# EAGLE board Motorsteuerung_op (EAGLE 9.5.1)
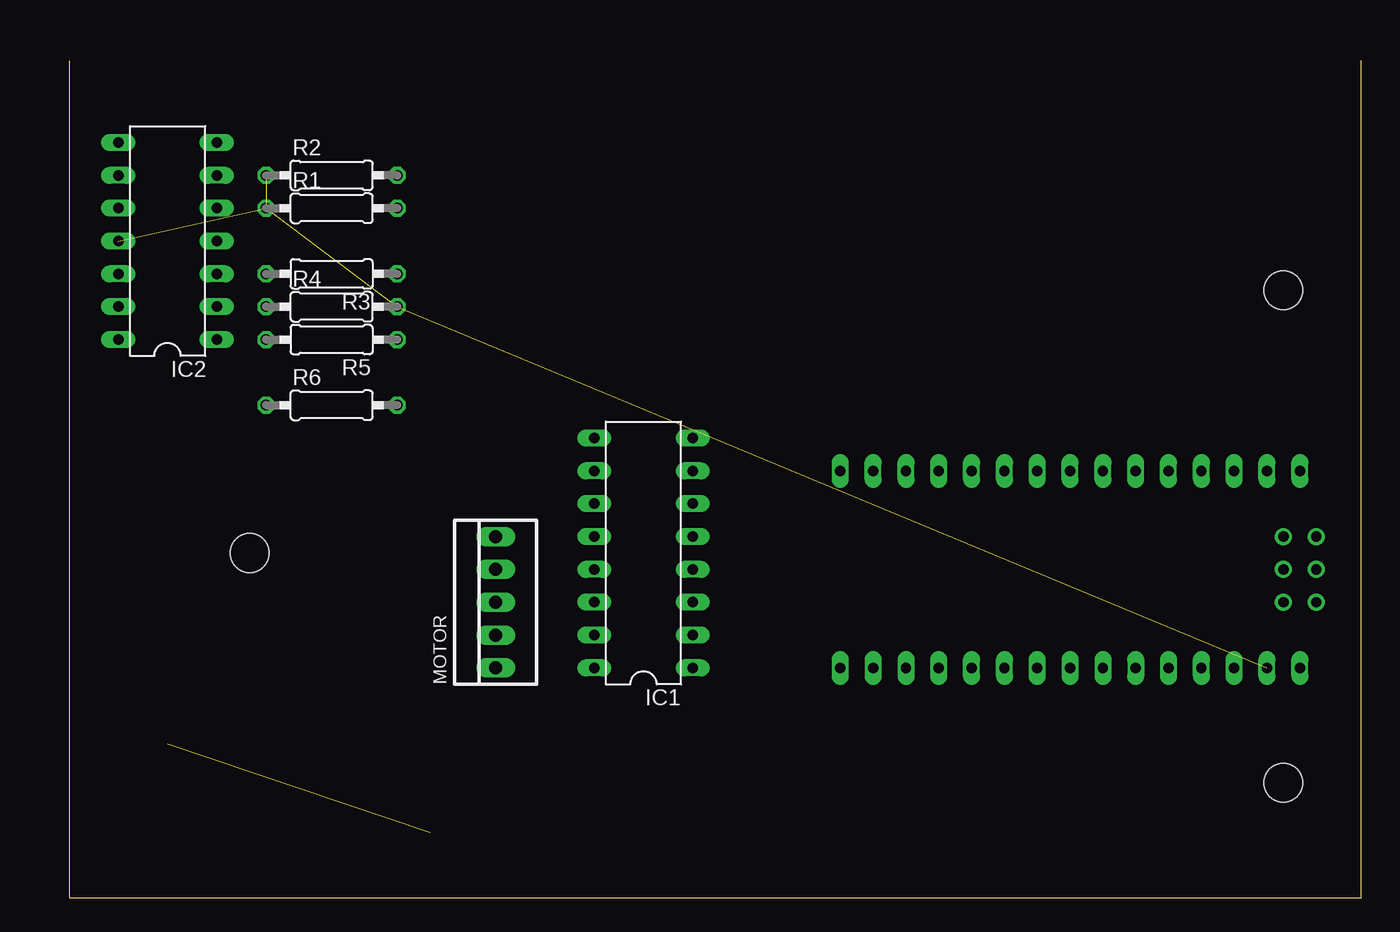
[diagram p0: board, top side]
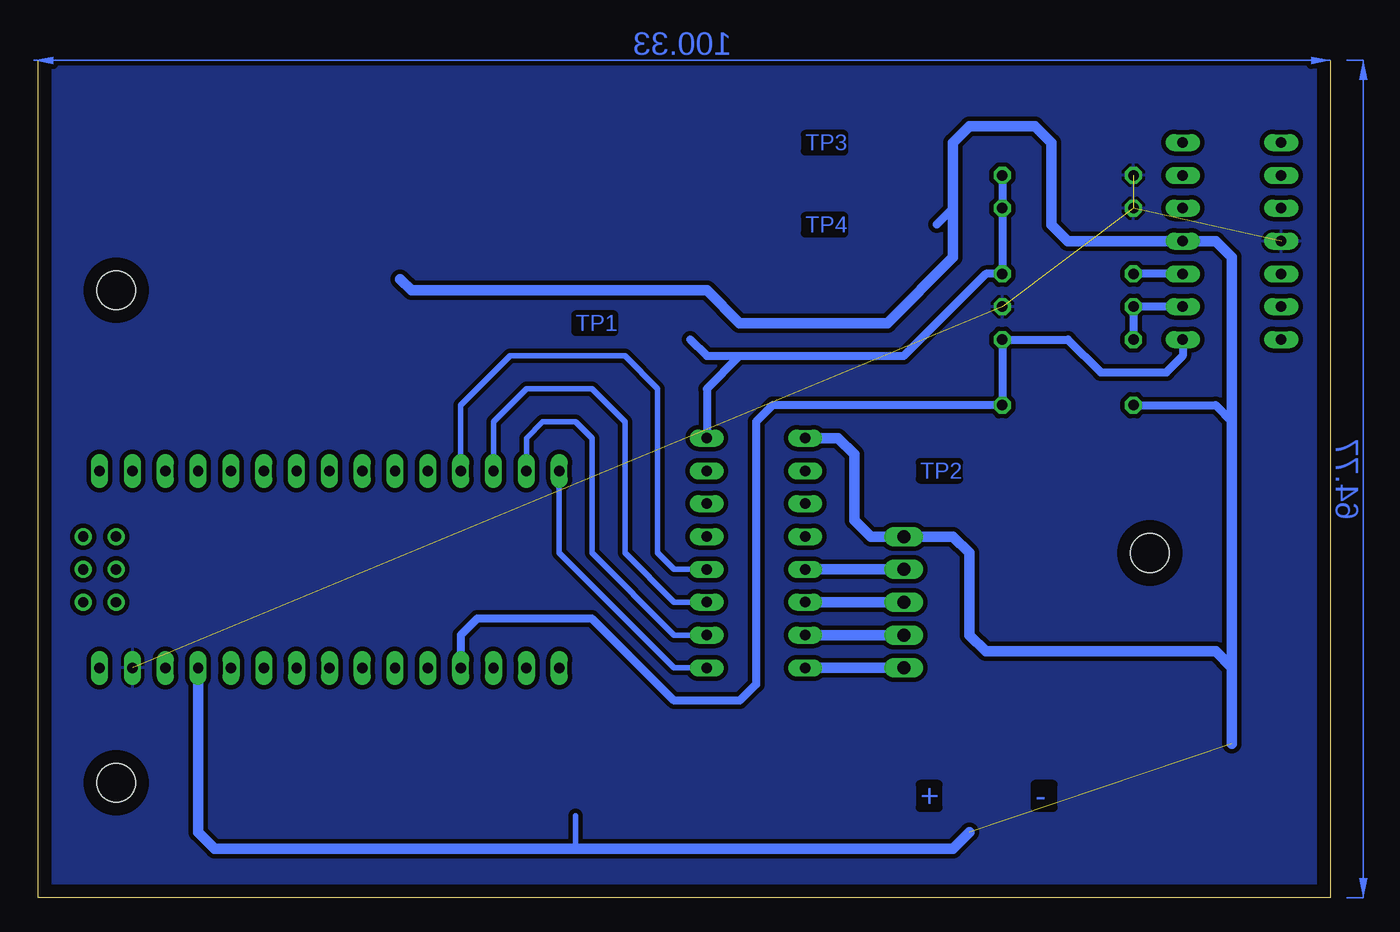
[diagram p1: board, bottom side, seen from below]

Size 100 x 64.76 mm. Coordinates in mm from the lower left corner, seen from the top.
Outline: 100,64.76 100,0 0,0 0,64.76
Copper layers (1*16): Top 0.035mm / dielectric 1.5mm / Bottom 0.035mm
Design rules "default *": minimum track width 6mil, minimum drill 0.35mm, track to track 6mil, track to pad 6mil, pad to pad 6mil, via to via 6mil, smd to smd 6mil, copper to edge 40mil, drill to drill 6mil, minimum pad ring 10mil, minimum via ring 8mil, stop-mask expansion 4mil, vias tented up to drill 0mil, thermal gap 10mil
Holes 3 mm at 13.97,26.67 93.98,8.89 93.98,46.99

## Footprints (pad centres in the part's own frame; a part is rotated, then mirrored left to right if it is on the bottom)
DIL16 = drill 0.813 long: 1 -8.89,-3.81; 2 -6.35,-3.81; 3 -3.81,-3.81; 4 -1.27,-3.81; 5 1.27,-3.81; 6 3.81,-3.81; 7 6.35,-3.81; 8 8.89,-3.81; 9 8.89,3.81; 10 6.35,3.81; 11 3.81,3.81; 12 1.27,3.81; 13 -1.27,3.81; 14 -3.81,3.81; 15 -6.35,3.81; 16 -8.89,3.81
DIL14 = drill 0.813 long: 1 -7.62,-3.81; 2 -5.08,-3.81; 3 -2.54,-3.81; 4 0,-3.81; 5 2.54,-3.81; 6 5.08,-3.81; 7 7.62,-3.81; 8 7.62,3.81; 9 5.08,3.81; 10 2.54,3.81; 11 0,3.81; 12 -2.54,3.81; 13 -5.08,3.81; 14 -7.62,3.81
22-23-2051 = drill 1 long: 1 -5.08,0; 2 -2.54,0; 3 0,0; 4 2.54,0; 5 5.08,0
0207/10 = drill 0.813 octagon: 1 -5.08,0; 2 5.08,0
NANO = drill 0.8 long: 3.3V -10.16,24.13; 5V -10.16,-1.27; A0 -10.16,19.05; A1 -10.16,16.51; A2 -10.16,13.97; A3 -10.16,11.43; A4 -10.16,8.89; A5 -10.16,6.35; A6 -10.16,3.81; A7 -10.16,1.27; AREF -10.16,21.59; D2 5.08,1.27; D3 5.08,3.81; D4 5.08,6.35; D5 5.08,8.89; D6 5.08,11.43; D7 5.08,13.97; D8 5.08,16.51; D9 5.08,19.05; D10 5.08,21.59; D11 5.08,24.13; D12 5.08,26.67; D13 -10.16,26.67; GND -10.16,-6.35; GND1 5.08,-1.27; RAW -10.16,-8.89; RST -10.16,-3.81; RST1 5.08,-3.81; RX1 5.08,-6.35; TX0 5.08,-8.89 | drill 0.8: ICSP1 -5.08,-10.16; ICSP2 -5.08,-7.62; ICSP3 -2.54,-10.16; ICSP4 -2.54,-7.62; ICSP5 0,-10.16; ICSP6 0,-7.62

## Placement (x,y rotation side)
IC1  ULN2003AN  [DIL16]  44.45,26.67 90 top
IC2  LM324P  [DIL14]  7.62,50.8 90 top
MOTOR  22-23-2051  [22-23-2051]  33.02,22.86 90 top
R1  6R2  [0207/10]  20.32,53.34 0 top
R2  6R2  [0207/10]  20.32,55.88 0 top
R3  4K7  [0207/10]  20.32,48.26 180 top
R4  4K7  [0207/10]  20.32,45.72 0 top
R5  33k  [0207/10]  20.32,43.18 180 top
R6  4K7  [0207/10]  20.32,38.1 0 top
U$1  NANO  [NANO]  86.36,27.94 90 top

## Library data of the parts
IC1 = uln-udn
IC2 = lm324
MOTOR = con-molex; MF: MOLEX; MPN: 22-23-2051; OC_FARNELL: 1462952; OC_NEWARK: 38C9178
R1-R6 = rcl; SPICEPREFIX: R
U$1 = Arduino-clone

## Nets
GND: IC2.11 R1.1 R2.1 R4.2 U$1.GND
N$1: IC1.16 MOTOR.1
N$2: IC1.1 U$1.D12
N$3: IC1.2 U$1.D11
N$4: IC1.3 U$1.D10
N$5: IC1.4 U$1.D9
N$6: IC1.15 MOTOR.2
N$7: IC1.14 MOTOR.3
N$8: IC1.13 MOTOR.4
N$9: IC1.8 R1.2 R2.2 R3.1
N$17: IC2.3 R3.2
N$18: IC2.1 R5.1 R6.2 U$1.A0
N$19: IC2.2 R4.1 R5.2
VCC: IC1.9 IC2.4 MOTOR.5 R6.1 U$1.5V

## Tracks (layer width: path | path; a pad name or v marks a point on that pad's centre or on a via)
GND  (4 unrouted)
  pour Bottom (isolate 0.35): 0,64.77 100.33,64.77 100.33,0 0,0
N$1
  Bottom 0.813: MOTOR.1 IC1.16
N$2
  Bottom 0.406: IC1.1 50.8,17.78 59.69,26.67 U$1.D12
N$3
  Bottom 0.406: IC1.2 50.8,20.32 57.15,26.67 57.15,35.56 58.42,36.83 60.96,36.83 62.23,35.56 U$1.D11
N$4
  Bottom 0.406: IC1.3 50.8,22.86 54.61,26.67 54.61,36.83 57.15,39.37 62.23,39.37 64.77,36.83 U$1.D10
N$5
  Bottom 0.406: IC1.4 50.8,25.4 52.07,26.67 52.07,39.37 54.61,41.91 63.5,41.91 67.31,38.1 U$1.D9
N$6
  Bottom 0.813: MOTOR.2 IC1.15
N$7
  Bottom 0.813: MOTOR.3 IC1.14
N$8
  Bottom 0.813: MOTOR.4 IC1.13
N$9
  Bottom 0.61: R2.2 R1.2 R3.1 26.67,48.26 33.02,41.91 45.72,41.91 | 45.72,41.91 48.26,39.37 IC1.8 | 49.53,43.18 48.26,41.91 45.72,41.91
N$17
  Bottom 0.61: IC2.3 R3.2
N$18
  Bottom 0.61: IC2.1 11.43,41.91 12.7,40.64 17.78,40.64 20.32,43.18 R5.1 R6.2 43.18,38.1 44.45,36.83 44.45,16.51 45.72,15.24 50.8,15.24 57.15,21.59 66.04,21.59 67.31,20.32 U$1.A0
N$19
  Bottom 0.61: IC2.2 R4.1 R5.2
VCC  (1 unrouted)
  Bottom 0.406: 58.42,6.35 58.42,3.81
  Bottom 0.61: R6.1 8.89,38.1 7.62,36.83 | 30.48,52.07 29.21,53.34
  Bottom 0.813: 27.94,5.08 29.21,3.81 58.42,3.81 86.36,3.81 87.63,5.08 U$1.5V | IC1.9 38.1,35.56 36.83,34.29 36.83,29.21 35.56,27.94 MOTOR.5 29.21,27.94 27.94,26.67 27.94,20.32 26.67,19.05 8.89,19.05 7.62,17.78 | 71.98,47.85 71.12,46.99 48.26,46.99 45.72,44.45 34.29,44.45 29.21,49.53 29.21,53.34 29.21,58.42 27.94,59.69 22.86,59.69 21.59,58.42 21.59,52.07 20.32,50.8 IC2.4 8.89,50.8 7.62,49.53 7.62,36.83 7.62,17.78 | 7.62,17.78 7.62,11.91
(copper drawn outside any net)
  shapes: Bottom area x2

## Text on the board
Bottom: TP3 | TP4 | TP1 | TP2 | - | +